# EAGLE board 16_bit_shift_register (EAGLE 9.7.0)

Size 197.15 x 149.62 mm. Coordinates in mm from the lower left corner, seen from the top.
Outline: 0,0 197.15,0 197.15,149.62 0,149.62 0,0
Copper layers (1*16): Top 0.035mm / dielectric 1.5mm / Bottom 0.035mm
Design rules "default": minimum track width 6mil, minimum drill 0.35mm, track to track 6mil, track to pad 6mil, pad to pad 6mil, via to via 6mil, smd to smd 6mil, copper to edge 40mil, drill to drill 6mil, minimum pad ring 10mil, minimum via ring 8mil, stop-mask expansion 4mil, vias tented up to drill 0mil, thermal gap 10mil

## Footprints (pad centres in the part's own frame; a part is rotated, then mirrored left to right if it is on the bottom)
CAP-THRU-2.54MM = drill 1.016 pad 1.88: 1 -1.27,0; 2 1.27,0
LEDRD254W60D565H860B = drill 0.981 pad 1.581: 1 -1.27,0; 2 1.27,0
BATTERY-GENERIC = drill 1.118 pad 3.15 octagon: + 2.54,0; - -2.54,0
RESAD1016W63L850D250B = drill 0.83 pad 1.43: 1 -5.08,0; 2 5.08,0
78B04ST = drill 0.8: 1 -3.81,-3.81; 2 -1.27,-3.81; 3 1.27,-3.81; 4 3.81,-3.81; 5 3.81,3.81; 6 1.27,3.81; 7 -1.27,3.81; 8 -3.81,3.81
DIP762W53P254L1969H508Q16B = drill 0.743 pad 1.343: 1 -3.81,8.89; 2 -3.81,6.35; 3 -3.81,3.81; 4 -3.81,1.27; 5 -3.81,-1.27; 6 -3.81,-3.81; 7 -3.81,-6.35; 8 -3.81,-8.89; 9 3.81,-8.89; 10 3.81,-6.35; 11 3.81,-3.81; 12 3.81,-1.27; 13 3.81,1.27; 14 3.81,3.81; 15 3.81,6.35; 16 3.81,8.89
DIP826W53P254L959H508Q8B = drill 0.786 pad 1.386: 1 -4.13,3.81; 2 -4.13,1.27; 3 -4.13,-1.27; 4 -4.13,-3.81; 5 4.13,-3.81; 6 4.13,-1.27; 7 4.13,1.27; 8 4.13,3.81

## Placement (x,y rotation side)
C1  1u  [CAP-THRU-2.54MM]  50.77,120.33 0 top
D1  RED  [LEDRD254W60D565H860B]  62.61,62.76 180 top
D2  RED  [LEDRD254W60D565H860B]  70.23,62.76 180 top
D3  RED  [LEDRD254W60D565H860B]  77.85,62.76 180 top
D4  RED  [LEDRD254W60D565H860B]  85.47,62.76 180 top
D5  RED  [LEDRD254W60D565H860B]  93.09,62.76 180 top
D6  RED  [LEDRD254W60D565H860B]  100.71,62.76 180 top
D7  RED  [LEDRD254W60D565H860B]  108.33,62.76 180 top
D8  RED  [LEDRD254W60D565H860B]  115.95,62.76 180 top
D9  RED  [LEDRD254W60D565H860B]  126.11,62.76 180 top
D10  RED  [LEDRD254W60D565H860B]  133.73,62.76 180 top
D11  RED  [LEDRD254W60D565H860B]  141.35,62.76 180 top
D12  RED  [LEDRD254W60D565H860B]  160.61,62.53 180 top
D13  RED  [LEDRD254W60D565H860B]  168.23,62.53 180 top
D14  RED  [LEDRD254W60D565H860B]  175.85,62.53 180 top
D15  RED  [LEDRD254W60D565H860B]  183.47,62.53 180 top
D16  RED  [LEDRD254W60D565H860B]  191.09,62.53 180 top
P1  BATTERYGENERIC  [BATTERY-GENERIC]  142.83,101.52 180 top
R1  1k  [RESAD1016W63L850D250B]  61.34,50.06 90 top
R2  1k  [RESAD1016W63L850D250B]  68.96,50.06 90 top
R3  1k  [RESAD1016W63L850D250B]  76.58,50.06 90 top
R4  1k  [RESAD1016W63L850D250B]  84.2,50.06 90 top
R5  1k  [RESAD1016W63L850D250B]  91.82,50.06 90 top
R6  1k  [RESAD1016W63L850D250B]  99.44,50.06 90 top
R7  1k  [RESAD1016W63L850D250B]  107.06,50.06 90 top
R8  1k  [RESAD1016W63L850D250B]  114.68,50.06 90 top
R9  1k  [RESAD1016W63L850D250B]  59.66,140.65 90 top
R10  1k  [RESAD1016W63L850D250B]  124.84,50.06 90 top
R11  470k  [RESAD1016W63L850D250B]  64.74,133.03 0 top
R12  1k  [RESAD1016W63L850D250B]  132.46,50.06 90 top
R13  1k  [RESAD1016W63L850D250B]  140.08,50.06 90 top
R14  1k  [RESAD1016W63L850D250B]  159.34,49.83 90 top
R15  1k  [RESAD1016W63L850D250B]  166.96,49.83 90 top
R16  1k  [RESAD1016W63L850D250B]  174.58,49.83 90 top
R17  1k  [RESAD1016W63L850D250B]  182.2,49.83 90 top
R18  1k  [RESAD1016W63L850D250B]  189.82,49.83 90 top
SW1  SPST-478B04ST  [78B04ST]  9.27,84.35 0 top
U1  74HC595_PDIP  [DIP762W53P254L1969H508Q16B]  29.59,66.57 90 top
U2  LM555_DIP  [DIP826W53P254L959H508Q8B]  60.93,124.14 90 top
U3  74HC595_PDIP  [DIP762W53P254L1969H508Q16B]  82.35,7.66 90 top

## Library data of the parts
C1 P1 R1-R18 SW1 U1 U3 = Tinkercad
D1-D16 = Tinkercad; CATEGORY: Opto-Electronic; SUB-CATEGORY: LED; VALUE: LED_RED
U2 = Tinkercad; CATEGORY: IC_Clock-Timing; CURRENT-SUPPLY: 10mA; DESCRIPTION: IC OSC SINGLE TIMER 100KHZ 8-DIP; FREQUENCY: 100kHz; MANUFACTURER: Texas Instruments; MPN: LM555CN/NOPB; OPERATING_TEMP: 0°C to 70°C; PART_STATUS: Active; ROHS_COMPLIANT: ROHS3 Compliant; SUB-CATEGORY: Timer

## Nets
D1_C: D1.2 R1.2
D2_C: D2.2 R2.2
D3_C: D3.2 R3.2
D4_C: D4.2 R4.2
D5_C: D5.2 R5.2
D6_C: D6.2 R6.2
D7_C: D7.2 R7.2
D8_C: D8.2 R8.2
D9_C: D9.2 R10.2
D10_C: D10.2 R12.2
D11_C: D11.2 R13.2
D12_C: D12.2 R14.2
D13_C: D13.2 R15.2
D14_C: D14.2 R16.2
D15_C: D15.2 R17.2
D16_C: D16.2 R18.2
P1+: P1.+ R9.2 SW1.5 SW1.6 SW1.7 SW1.8 U1.10 U1.16 U2.4 U2.8 U3.10 U3.16
P1-: C1.1 P1.- R1.1 R2.1 R3.1 R4.1 R5.1 R6.1 R7.1 R8.1 R10.1 R12.1 R13.1 R14.1 R15.1 R16.1 R17.1 R18.1 U1.8 U1.13 U2.1 U3.8 U3.13
U1_Q0: D1.1 U1.15
U1_Q1: D2.1 U1.1
U1_Q2: D3.1 U1.2
U1_Q3: D4.1 U1.3
U1_Q4: D5.1 U1.4
U1_Q5: D6.1 U1.5
U1_Q6: D7.1 U1.6
U1_Q7: D8.1 U1.7 U3.14
U1_RCLK: U1.12 U2.3 U3.12
U1_SER: SW1.1 U1.14
U1_SRCLK: SW1.2 U1.11 U3.11
U2_DIS: R9.1 R11.1 U2.7
U2_THR: C1.2 R11.2 U2.2 U2.6
U3_Q0: D9.1 U3.15
U3_Q1: D10.1 U3.1
U3_Q2: D11.1 U3.2
U3_Q3: D12.1 U3.3
U3_Q4: D13.1 U3.4
U3_Q5: D14.1 U3.5
U3_Q6: D15.1 U3.6
U3_Q7: D16.1 U3.7

## Tracks (layer width: path | path; a pad name or v marks a point on that pad's centre or on a via)
D1_C  (1 unrouted)
D2_C  (1 unrouted)
D3_C  (1 unrouted)
D4_C  (1 unrouted)
D5_C  (1 unrouted)
D6_C  (1 unrouted)
D7_C  (1 unrouted)
D8_C  (1 unrouted)
D9_C  (1 unrouted)
D10_C  (1 unrouted)
D11_C  (1 unrouted)
D12_C  (1 unrouted)
D13_C  (1 unrouted)
D14_C  (1 unrouted)
D15_C  (1 unrouted)
D16_C  (1 unrouted)
P1+  (11 unrouted)
P1-  (22 unrouted)
U1_Q0  (1 unrouted)
U1_Q1  (1 unrouted)
U1_Q2  (1 unrouted)
U1_Q3  (1 unrouted)
U1_Q4  (1 unrouted)
U1_Q5  (1 unrouted)
U1_Q6  (1 unrouted)
U1_Q7  (2 unrouted)
U1_RCLK  (2 unrouted)
U1_SER  (1 unrouted)
U1_SRCLK  (2 unrouted)
U2_DIS  (2 unrouted)
U2_THR  (3 unrouted)
U3_Q0  (1 unrouted)
U3_Q1  (1 unrouted)
U3_Q2  (1 unrouted)
U3_Q3  (1 unrouted)
U3_Q4  (1 unrouted)
U3_Q5  (1 unrouted)
U3_Q6  (1 unrouted)
U3_Q7  (1 unrouted)